# EAGLE board MotorEncoder (EAGLE 6.3)
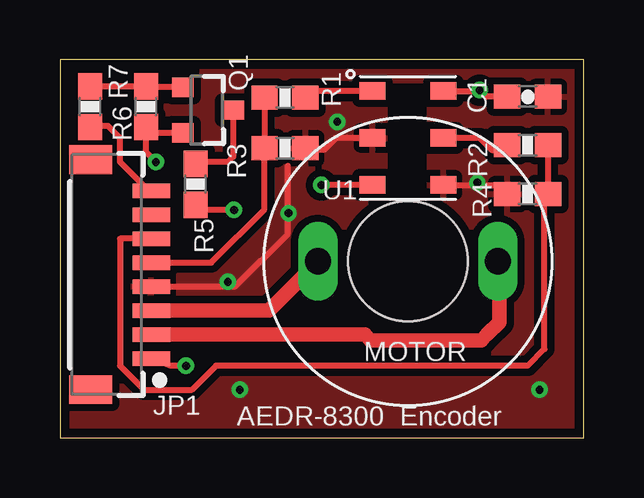
[diagram p0: board, top side]
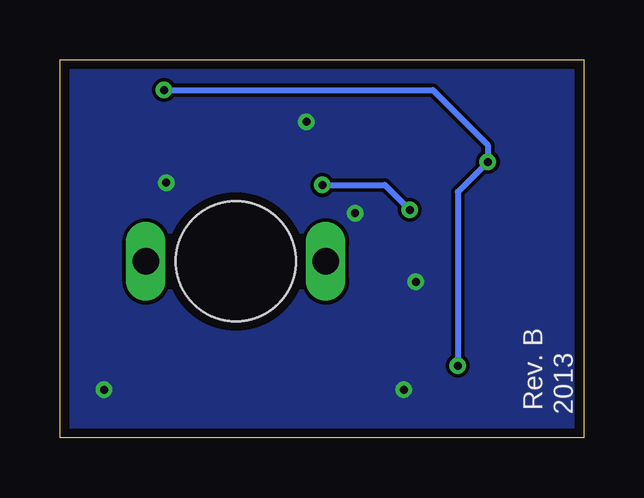
[diagram p1: board, bottom side, seen from below]

Size 21.84 x 15.75 mm. Coordinates in mm from the lower left corner, seen from the top.
Outline: 0,0 21.84,0 21.84,15.75 0,15.75 0,0
Copper layers (1*16): Top 0.0356mm / dielectric 1.5011mm / Bottom 0.0356mm
Design rules "LaenPCBOrder *": minimum track width 6mil, minimum drill 13mil, track to track 6mil, track to pad 6mil, pad to pad 6mil, via to via 6mil, smd to smd 6mil, copper to edge 15mil, drill to drill 6mil, minimum pad ring 7mil, minimum via ring 7mil, stop-mask expansion 4mil, vias tented up to drill 13mil, thermal gap 10mil
tRestrict: area 14,10.2 to 15,14.5

## Footprints (pad centres in the part's own frame; a part is rotated, then mirrored left to right if it is on the bottom)
0603-CAP = smd 1.1 x 1: 1 -0.85,0; 2 0.85,0
BM08B-SRSS-TB = smd 0.6 x 1.55: 1 -3.5,0; 2 -2.5,0; 3 -1.5,0; 4 -0.5,0; 5 0.5,0; 6 1.5,0; 7 2.5,0; 8 3.5,0 | smd 1.2 x 1.8: P$9 4.8,2.525; P$10 -4.8,2.525
GEARED_MOTOR = drill 1.1 long: 1 -3.75,0; 2 3.75,0 | hole 5: 0,0
SOT23-3 = smd 0.8 x 0.9: 1 -0.95,-1; 2 0.95,-1; 3 0,1.1
0603-RES = smd 1.1 x 1: 1 -0.85,0; 2 0.85,0
AEDR8300 = smd 1.08 x 0.72: 1 -1.48,1.96; 2 -1.48,0; 3 -1.48,-1.96; 4 1.48,-1.96; 5 1.48,0; 6 1.48,1.96

## Placement (x,y rotation side)
C1  [0603-CAP]  19.5,14.22 0 top
JP1  [BM08B-SRSS-TB]  3.81,6.8 90 top
MOTOR  GEARED_MOTOR  [GEARED_MOTOR]  14.51,7.35 0 top
Q1  TRANSISTOR_PNPSMD  [SOT23-3]  6.12,13.66 270 top
R1  [0603-RES]  9.38,14.18 0 top
R2  [0603-RES]  19.5,12.2 180 top
R3  [0603-RES]  9.38,12.07 180 top
R4  [0603-RES]  19.5,10.16 0 top
R5  220  [0603-RES]  5.66,10.57 90 top
R6  [0603-RES]  3.59,13.8 90 top
R7  [0603-RES]  1.25,13.8 90 top
U1  AEDR8300  [AEDR8300]  14.51,12.5 0 top

## Library data of the parts
C1 R1-R7 = SparkFun-Passives
JP1 = SparkFun-Connectors
MOTOR = geared-motor
Q1 = SparkFun-DiscreteSemi
U1 = AEDR8300

## Nets
+5V: C1.1 JP1.1 Q1.2 R6.1 U1.6
CHA: JP1.6 R2.1 R4.2
CHB: JP1.5 R1.1 R3.2
GND: C1.2 JP1.4 R3.1 R4.1 U1.2 U1.4
M1: JP1.3 MOTOR.1
M2: JP1.2 MOTOR.2
N$1: R5.1 U1.3
N$2: Q1.3 R5.2
N$3: Q1.1 R6.2 R7.2
N$4: R1.2 U1.1
N$5: R2.2 U1.5
N$10: JP1.7
VLED: JP1.8 R7.1

## Tracks (layer width: path | path; a pad name or v marks a point on that pad's centre or on a via)
+5V  (via drill 0.33)
  Top 0.254: 15.99,14.51 U1.6 17.46,14.46 v17.5,14.5 17.78,14.22 C1.1 | Q1.2 3.58,12.71 | 3.58,12.71 3.5,12.79 | 3.5,12.79 R6.1 arc-90 3.5,12.79 | v5.25,3 4.61,3 JP1.1 | 3.58,12.71 3.58,11.92 v4,11.5
  Bottom 0.254: v17.5,14.5 6.29,14.5 4,12.21 v4,11.5 5.25,10.25 v5.25,3
CHA
  Top 0.254: JP1.6 2.5,8.3 2.5,3 3.5,2 5.5,2 6.5,3 19.5,3 20.2,3.7 20.2,10.05 R4.2 R2.1
CHB
  Top 0.254: JP1.5 6.31,7.3 8.53,9.52 R3.2 R1.1
GND  (via drill 0.33)
  Top 0.254: U1.2 11.5,12.5 11,12 10.3,12 R3.1 10.23,11.73 | JP1.4 7.3,6.3 9.5,8.5 9.5,11.35 | U1.4 18.37,10.54
  other vias: 20,2 7,6.5 7.5,2 9.53,9.37 17.41,10.64 11.56,13.18
  pour Bottom: 0,0 0,15.75 22,15.75 22,0
  pour Top (isolate 0.305): 0,0 0,15.75 22,15.75 22,0
M1
  Top 0.61: JP1.3 8.71,5.3 MOTOR.1
M2
  Top 0.61: MOTOR.2 18.32,7.29 18.32,4.81 17.81,4.3 17.57,4.06 12.95,4.06 12.72,4.3 JP1.2
N$1  (via drill 0.33)
  Top 0.254: U1.3 v10.9,10.54 | v7.25,9.5 5.44,9.5 R5.1
  Bottom 0.254: v10.9,10.54 8.29,10.54 v7.25,9.5
N$2
  Top 0.254: Q1.3 7.22,11.72 7,11.5 5.74,11.5 R5.2
N$3
  Top 0.254: R7.2 R6.2 3.38,14.61 Q1.1
N$4
  Top 0.254: U1.1 10.5,14.46 R1.2
N$5
  Top 0.254: U1.5 17.5,12.5 18,12 18.55,12 R2.2
VLED
  Top 0.254: JP1.8 3.7,10.3 2.5,11.5 2.5,12.5 2,13 1.3,13 R7.1

## Text on the board
tNames: AEDR-8300 Encoder
bNames: Rev. B | 2013